# Altium PCB PCB1.PcbDoc
Units mil, origin at the board's own origin, x right, y up, seen from the top; angles counter-clockwise.
Board outline 1327.86 x 805.21 mil, 4 copper layers (Top Layer, POWER, GND, Bottom Layer), stack 23.756 mil thick; 64 components, 41 nets, 197 pads, 167 vias.
Unrouted connection lines stored in the file: 58.
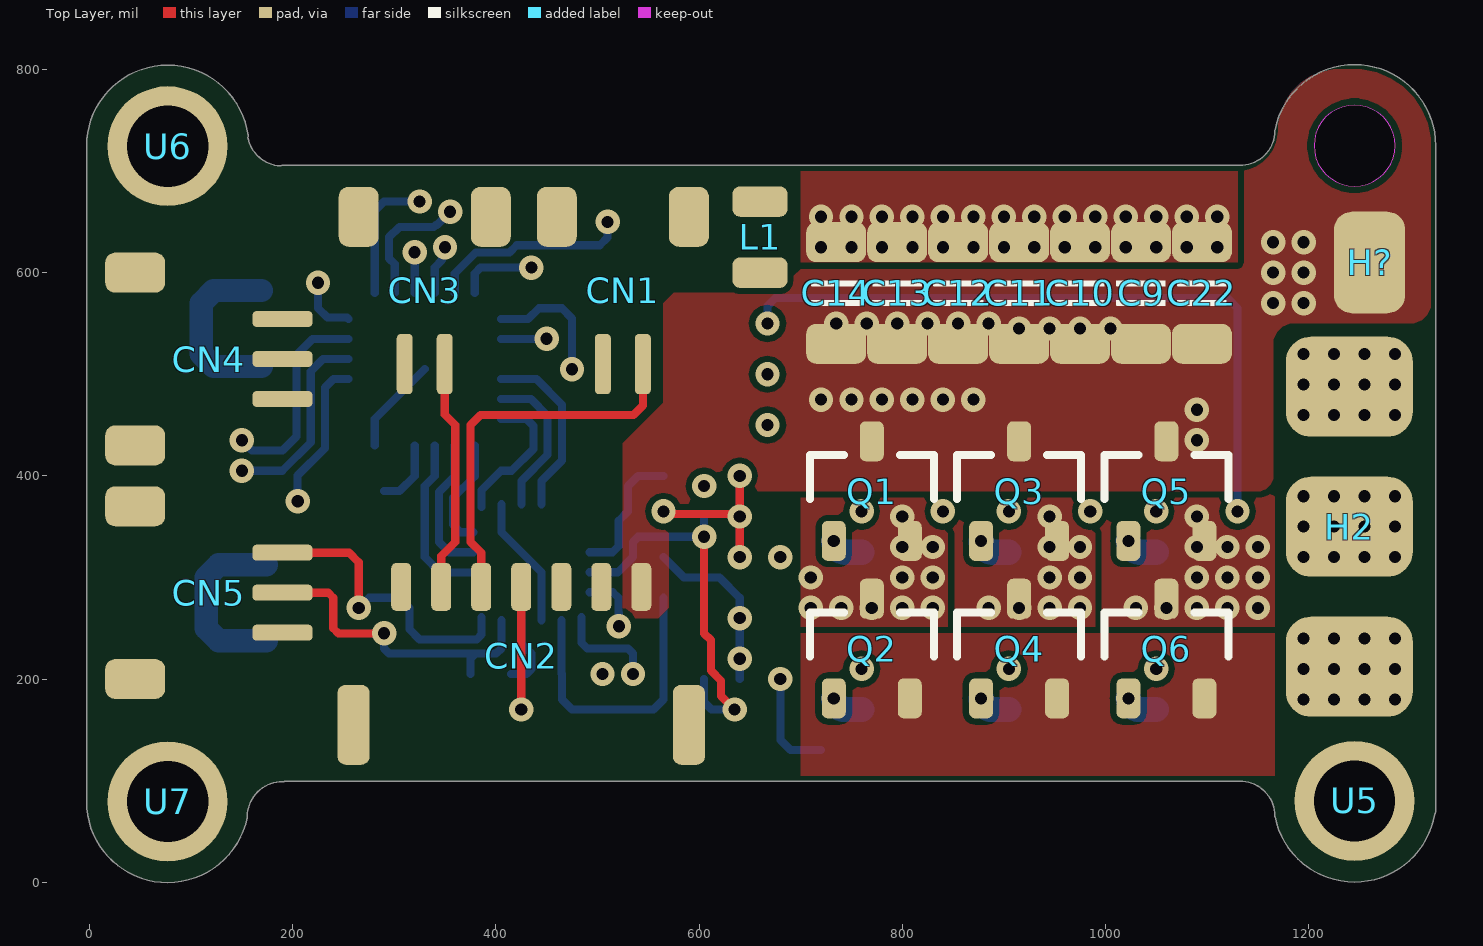
[diagram p0: Top Layer view]
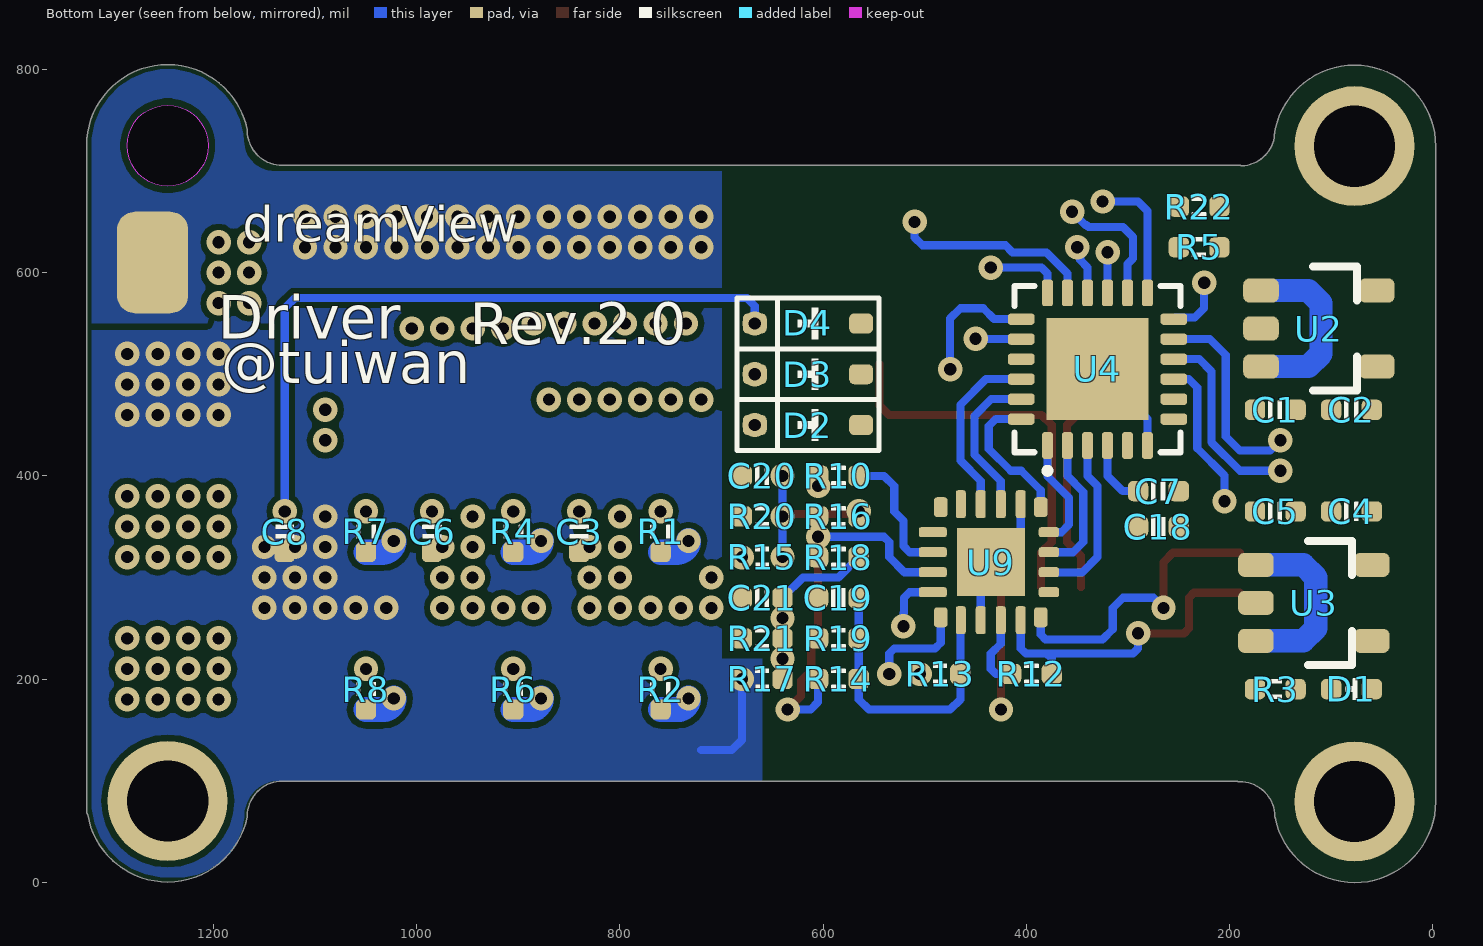
[diagram p1: Bottom Layer view, seen from below]
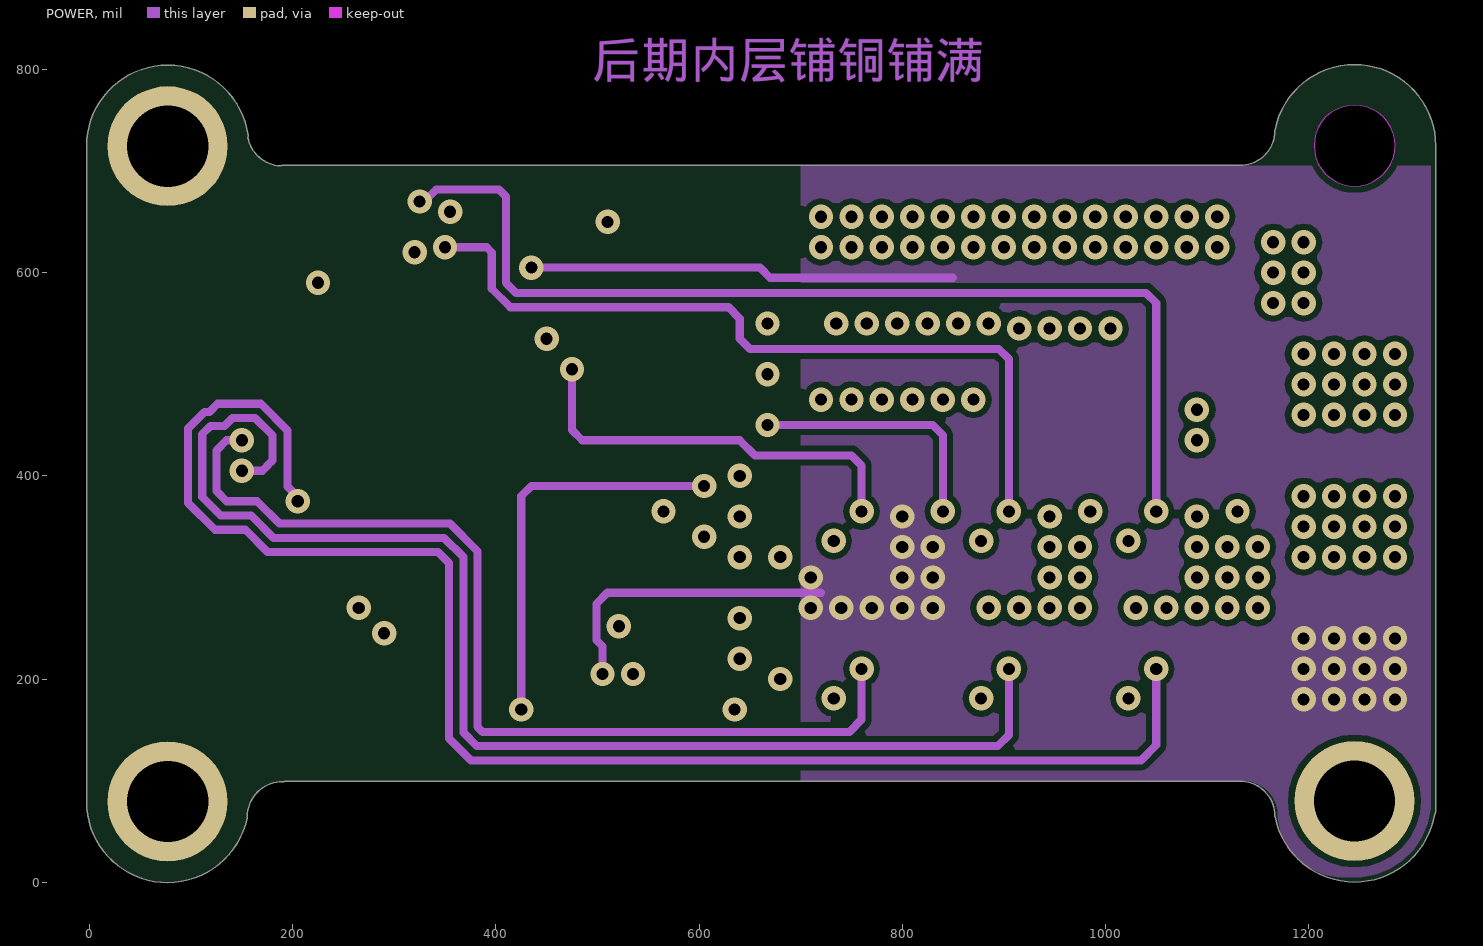
[diagram p2: POWER]
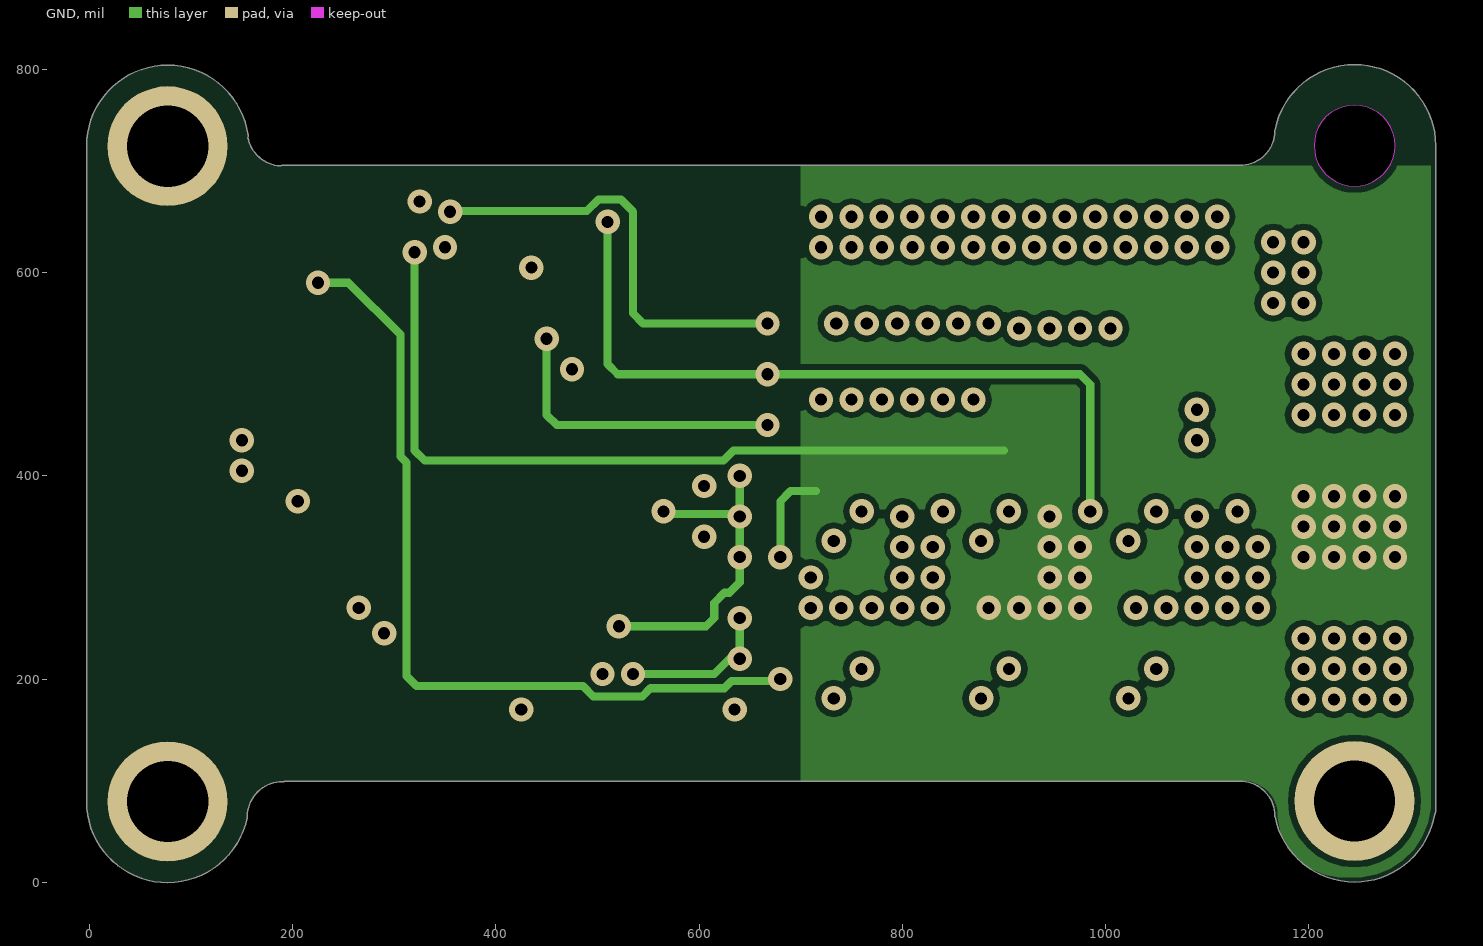
[diagram p3: GND]
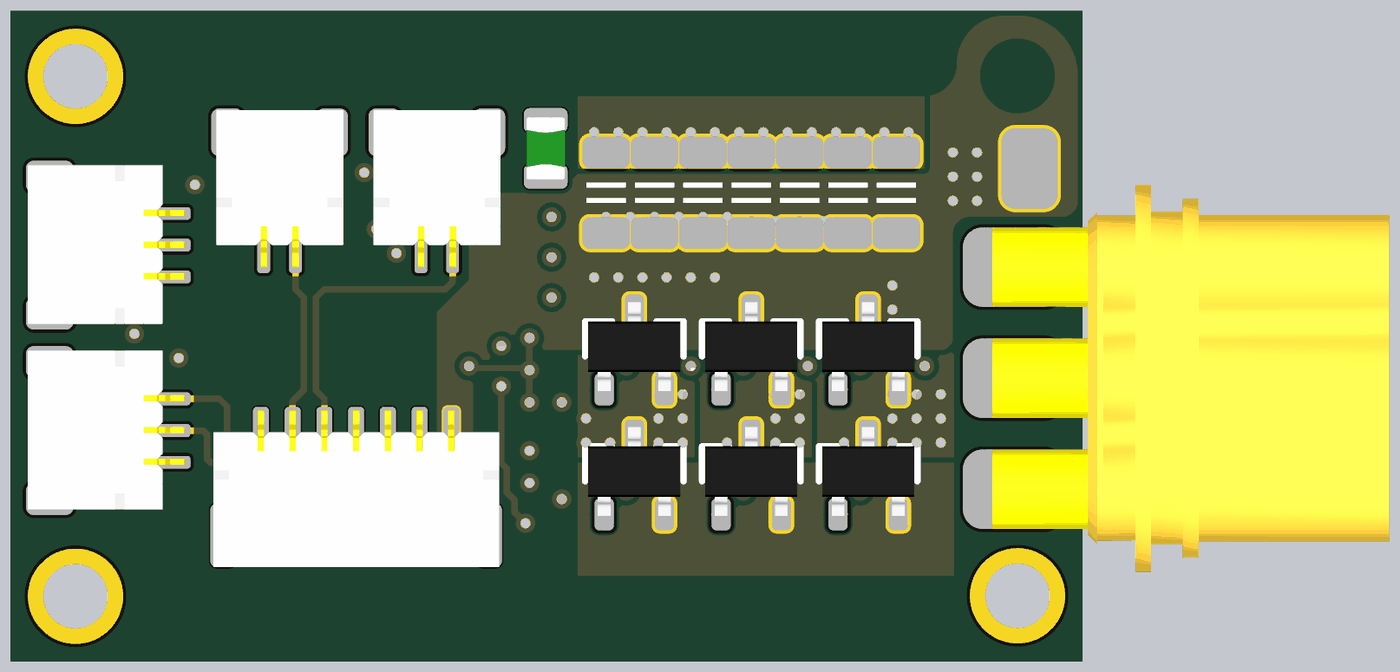
[diagram p4: 3D render of the assembled board from above, using the file's embedded part models]
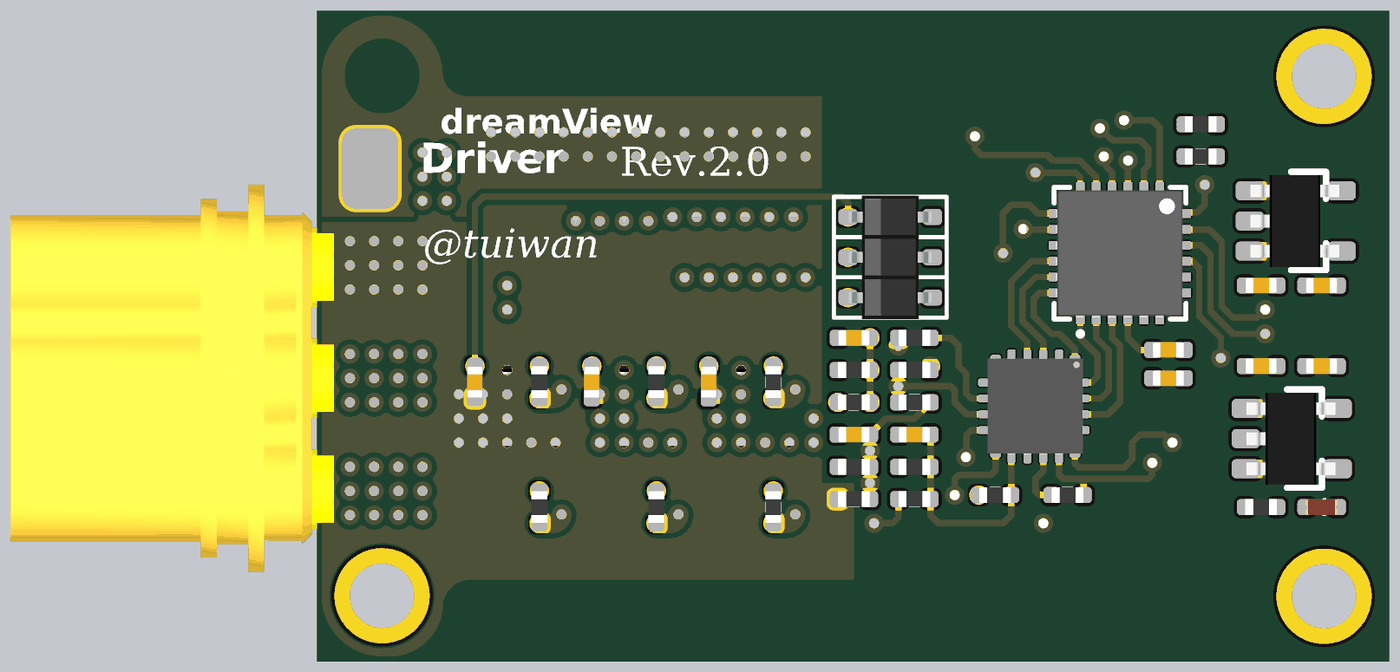
[diagram p5: 3D render of the assembled board from below, using the file's embedded part models]

## Layer stack, top to bottom
Top Solder: solder mask 0.4, Solder Resist, Dk 3.5
Top Layer: signal copper 1.4
Dielectric 2: prepreg 2.8, PP-006, Dk 4.1
POWER: signal copper 1.378
Dielectric 1: dielectric 12.6, FR-4, Dk 4.8
GND: signal copper 1.378
Dielectric 3: prepreg 2.8, PP-006, Dk 4.1
Bottom Layer: signal copper 1.4
Bottom Solder: solder mask 0.4, Solder Resist, Dk 3.5

## Board outline
76.97,-0.39 ccw(c76.97,79.43) 155.25,63.81 ccw(c150.33,64.79) 155.34,64.79 ccw(c150.33,64.79) 155.34,64.94 cw(c189.69,64.49) 189.96,98.84 ccw(c190,103.86) 192.33,99.41 1130,99.41 ccw(c1130,104.43) 1131.08,99.53 ccw(c1132.16,104.43) 1132.2,99.41 cw(c1132.47,65.06) 1166.82,65.33 ccw(c1171.84,65.37) 1166.92,64.39 ccw(c1245.2,80) 1245.2,0.18 ccw(c1245.2,80) 1323.93,66.88 ccw(c1320,70) 1325.02,70 1325.02,725 ccw(c1245.2,725) 1245.2,804.82 ccw(c1245.2,725) 1166.92,740.61 ccw(c1171.84,739.63) 1166.83,739.49 cw(c1132.47,739.94) 1132.25,705.59 ccw(c1132.17,700.57) 1132.17,705.59 672.83,705.59 190,705.59 ccw(c190,700.57) 187.78,705.07 cw(c189.69,739.37) 155.95,732.93 ccw(c151.12,734.29) 156.13,734.29 ccw(c151.12,734.29) 156.09,734.95 ccw(c76.97,724.43) 76.97,804.25 ccw(c76.97,724.43) -2.85,724.43 -2.85,79.43 ccw(c76.97,79.43)
cut-out: 1205.28,725 ccw(c1245.2,725) 1245.2,685.08 ccw(c1245.2,725) 1285.12,725 ccw(c1245.2,725) 1245.2,764.92 ccw(c1245.2,725)

## Design rules (kind name [scope] priority, off if disabled: settings)
Clearance [All] p1: gap=6 ignorepadtopadclearanceinfootprint=FALSE
ComponentClearance [All] p1 off: gap=10 collisioncheckmode=3 verticalgap=10 showdistances=FALSE
HoleSize [All] p1: absolutevalues=TRUE maxlimit=248.03 minlimit=7.87 maxpercent=80.000 minpercent=20.000
HoleToHoleClearance [All] p1: gap=6 allowstackedmicrovias=TRUE
MinimumSolderMaskSliver [All] p1: minsoldermaskwidth=6
PlaneConnect [All] p1: planeconnectstyle=Direct reliefexpansion=20 reliefentries=4 reliefconductorwidth=10 reliefairgap=10
PolygonConnect [All] p1: connectstyle=Direct reliefconductorwidth=10 reliefentries=4 polygonreliefangle="90 Angle" airgapwidth=10
RoutingVias [All] p1: holewidth=11.81 width=19.68 viastyle="Through Hole" minholewidth=11.81 minwidth=19.68 maxholewidth=236.22 maxwidth=393.7
SilkToSilkClearance [All] p1: silktosilkclearance=0
SilkToSolderMaskClearance [IsPad] p1: minsilkscreentomaskgap=0 clearancetoexposedcopper=FALSE
SolderMaskExpansion [All] p1: expansion=4
Width [All] p1: maxlimit=100 minlimit=5 preferedwidth=8 midlayer2_maxwidth=10 minimp=50.000000 maximp=50.000000 favimp=50.000000
23 further rules are at their usual default settings.

## Components (designator, comment, footprint, x,y, rotation, side; value= is the part's Value field where it differs from the comment)
C1 "?uF" CAP_0402 155,465 r180 bottom
C2 "?uF" CAP_0402 80,465 r0 bottom
C3 "?uF" CAP_0402 840,345 r90 bottom
C4 "?uF" CAP_0402 80,365 r0 bottom
C5 "?uF" CAP_0402 155,365 r180 bottom
C6 "?uF" CAP_0402 985,345 r90 bottom
C7 "10uF" CAP_0402 270,385 r0 bottom
C8 "?uF" CAP_0402 1130,345 r90 bottom
C9 "?uF" CAP_1206 1035,580 r270 top
C10 "?uF" CAP_1206 975,580 r270 top
C11 "?uF" CAP_1206 915,580 r270 top
C12 "?uF" CAP_1206 855,580 r270 top
C13 "?uF" CAP_1206 795,580 r270 top
C14 "?uF" CAP_1206 735,580 r270 top
C18 "?uF" CAP_0402 270,350 r0 bottom
C19 "?uF" CAP_0402 585,280 r0 bottom
C20 "?uF" CAP_0402 660,400 r0 bottom
C21 "?uF" CAP_0402 660,280 r0 bottom
C22 "?uF" CAP_1206 1095,580 r270 top
CN1 "HDGC1002WR-S-3P" SH1.0_2P 525,585 r180 top
CN2 "HDGC1002WR-S-7P" SH1.0_7P 425,210 r0 top
CN3 "HDGC1002WR-S-3P" SH1.0_2P 330,585 r180 top
CN4 "HDGC1002WR-S-3P" SH1.0_3P#1 110,515 r270 top
CN5 "HDGC1002WR-S-3P" SH1.0_3P#2 110,285 r270 top
D1 "color?" LED_0402 80,190 r0 bottom
D2 "Value" SOD_323 615,450 r0 bottom value=color?
D3 "Value" SOD_323 615,500 r0 bottom value=color?
D4 "Value" SOD_323 615,550 r0 bottom value=color?
H2 "MR30" MR30_F 1240,350 r90 top
H? "XT30U_M" XT60双面-小 1260,610 r0 top
L1 "Value" IND_0805 660,635 r270 top
Q1 "Value" SOT23_3 770,385 r90 top
Q2 "Value" SOT23_3 770,230 r90 top
Q3 "Value" SOT23_3 915,385 r90 top
Q4 "Value" SOT23_3 915,230 r90 top
Q5 "Value" SOT23_3 1060,385 r90 top
Q6 "Value" SOT23_3 1060,230 r90 top
R1 "?K" RES_0402 760,345 r270 bottom value=22R
R2 "?K" RES_0402 760,190 r90 bottom value=22R
R3 "?K" RES_0402 155,190 r180 bottom value=22R
R4 "?K" RES_0402 905,345 r90 bottom value=22R
R5 "10K" RES_0402 230,625 r0 bottom value=22R
R6 "?K" RES_0402 905,190 r270 bottom value=22R
R7 "?K" RES_0402 1050,345 r270 bottom value=22R
R8 "?K" RES_0402 1050,190 r270 bottom value=22R
R10 "1K" RES_0402 585,400 r0 bottom value=22R
R12 "10K" RES_0402 395,205 r0 bottom value=22R
R13 "47K" RES_0402 485,205 r180 bottom value=22R
R14 "10K" RES_0402 585,200 r0 bottom value=22R
R15 "47K" RES_0402 660,320 r180 bottom value=22R
R16 "10K" RES_0402 585,360 r0 bottom value=22R
R17 "47K" RES_0402 660,200 r180 bottom value=22R
R18 "10K" RES_0402 585,320 r0 bottom value=22R
R19 "4.7K" RES_0402 585,240 r180 bottom value=22R
R20 "4.7K" RES_0402 660,360 r180 bottom value=22R
R21 "4.7K" RES_0402 660,240 r180 bottom value=22R
R22 "10K" RES_0402 230,665 r0 bottom value=22R
U2 "SPX3819M5-5" SOT23_5 110,545 r180 bottom
U3 "SPX3819M5-5" SOT23_5 115,275 r180 bottom
U4 "FD6288Q" QFN-24_L4.0-W4.0-P0.50-BL-EP2.6 330,505 r180 bottom
U5 "螺柱孔" M2 1245.2,80 r0 top
U6 "螺柱孔" M2 76.97,724.43 r0 top
U7 "螺柱孔" M2 76.97,79.43 r0 top
U9 "EFM8BB21F16G-C-QFN20R" QFN-20_L3.0-W3.0-P0.50-BL-EP1.7_EFM8BB21F16G 435,315 r180 bottom

## Footprints (in the part's own frame and the unit in brackets; to place one, negate y for a bottom-side part, rotate by r counter-clockwise, add the part's x,y. Pads: shape width x height; smd on the part's side, far side on the other; paste and mask are expansions set on the pad)
CAP_0402 [mil] "CAP_0402"
  rrect50% 20x20 smd: 1(-20,0) 2(20,0)
  silkscreen extent -7,-9 7,9, body extent -20,-10 20,10, height 20
CAP_1206 [mm] "CAP_1206"
  rrect50% 1x1.5 smd: 1(-1.27,0) 2(1.27,0)
  silkscreen extent -0.3,-0.61 0.3,0.61, body extent -1.5,-0.75 1.5,0.75, height 1.5
IND_0805 [mil]
  rrect50% 30x54.21 smd mask+2: 1(-35,0) 2(35,0)
  body extent -39,-25 39,25, height 24
LED_0402 [mil] "LED_0402"
  rrect50% 20x20 smd: 1(-20,0) 2(20,0)
  silkscreen extent -6,-10 6,10, body extent -20,-10 20,10, height 18
M2 [mm] "M2螺孔"
  round 3 hole 2.032 mask+0.102: 1(0,0)
MR30_F [mm] "MR30_F_卧贴"
  rrect50% 2.5x3.175 smd: 1(-3.5,0) 2(0,0) 3(3.5,0)
  body extent -6.1,-11.84 6.1,0.66, height 2.6
QFN-20_L3.0-W3.0-P0.50-BL-EP1.7_EFM8BB21F16G [mm]
  rrect50% 0.34x0.5 smd mask+0.05: 1(-1.252,-1.377) 6(1.249,-1.377) 11(1.249,1.377) 16(-1.252,1.377)
  rrect50% 0.25x0.7 smd mask+0.05: 2(-0.751,-1.45) 3(-0.252,-1.45) 4(0.249,-1.45) 5(0.748,-1.45) 12(0.748,1.45) 13(0.249,1.45) 14(-0.252,1.45) 15(-0.751,1.45)
  rrect50% 0.508x0.25 smd mask+0.05: 7(1.451,-0.75) 8(1.451,-0.25) 9(1.451,0.25) 10(1.451,0.75)
  rrect50% 0.7x0.25 smd mask+0.05: 17(-1.451,0.75) 18(-1.451,0.25) 19(-1.451,-0.25) 20(-1.451,-0.75)
  rect 1.7x1.7 smd mask+0.05: 21(-0.001,0)
  body extent -1.51,-1.5 1.51,1.52, height 0.82
QFN-24_L4.0-W4.0-P0.50-BL-EP2.6 [mm]
  rrect50% 0.28x0.665 smd mask+0.05: 1(-1.25,-1.908) 2(-0.75,-1.908) 3(-0.25,-1.908) 4(0.25,-1.908) 5(0.75,-1.908) 6(1.25,-1.908) 13(1.25,1.908) 14(0.75,1.908) 15(0.25,1.908) 16(-0.25,1.908) 17(-0.75,1.908) 18(-1.25,1.908)
  rrect50% 0.665x0.28 smd mask+0.05: 7(1.908,-1.25) 8(1.908,-0.75) 9(1.908,-0.25) 10(1.908,0.25) 11(1.908,0.75) 12(1.908,1.25) 19(-1.908,1.25) 20(-1.908,0.75) 21(-1.908,0.25) 22(-1.908,-0.25) 23(-1.908,-0.75) 24(-1.908,-1.25)
  rect 2.55x2.55 smd mask+0.05: 25(0,0)
  silkscreen extent -2.08,-2.61 2.08,2.08, body extent -2.01,-2.01 1.99,1.99, height 0.92
RES_0402 [mil] "RES_0402"
  rrect50% 20x20 smd: 1(-20,0) 2(20,0)
  silkscreen extent -6,-10 7,10, body extent -20,-10 20,10, height 14
SH1.0_2P [mm] "SH1.0_2P"
  rrect50% 0.4x1.5 smd: 1(-0.5,1.905) 2(0.5,1.905)
  rrect50% 1x1.5 smd: SH1(-1.651,-1.778) SH2(1.651,-1.778)
  body extent -2.01,-2.47 1.99,2.48, height 2.9
SH1.0_3P#1 [mm] "SH1.0_3P"
  rrect50% 0.4x1.5 smd: 1(-1,2.032) 2(0,2.032) 3(1,2.032)
  rrect50% 1x1.5 smd: SH1(-2.159,-1.651) SH2(2.159,-1.651)
  body extent -2.52,-2.34 2.48,2.6, height 2.9
SH1.0_3P#2 [mm] "SH1.0_3P"
  rrect50% 0.4x1.5 smd: 1(-1,2.032) 2(0,2.032) 3(1,2.032)
  rrect50% 1x1.5 smd: 4(2.159,-1.651) 5(-2.159,-1.651)
  body extent -2.52,-2.34 2.48,2.6, height 2.9
SH1.0_7P [mm] "SH1.0_7P"
  rrect50% 0.5x1.2 smd mask+0.05: 1(-3,2.05) 2(-2,2.05) 3(-1,2.05) 4(0,2.05) 5(1,2.05) 6(2,2.05) 7(3,2.05)
  rrect50% 0.8x2 smd mask+0.05: 8(4.191,-1.397) 9(-4.191,-1.397)
  body extent -4.5,-2.4 4.5,2.55, height 2.9
SOD_323 [mm] "SOD_323"
  rrect50% 0.6x0.5 smd: 1(-1.329,0) 2(1.329,0)
  silkscreen extent -1.78,-0.64 1.78,0.64, body extent -1.3,-0.68 1.3,0.67, height 1.15
SOT23_3 [mm] "SOT23, 3-Leads, Body 3.1x3.0mm (max), Pitch 0.95mm, IPC Medium Density"
  rrect50% 1x0.6 smd: 1(-1.246,0.95) 2(-1.246,-0.95) 3(1.246,0)
  silkscreen extent -0.2,-1.55 0.9,1.55, body extent -1.3,-1.45 1.5,1.45, height 1.2
SOT23_5 [mm] "SOT23_5"
  rrect50% 0.889x0.6 smd: 1(-1.5,0.95) 2(-1.5,0) 3(-1.5,-0.95) 4(1.396,-0.95) 5(1.396,0.95)
  silkscreen extent -0.2,-1.55 0.9,1.55, body extent -1.48,-1.45 1.32,1.45, height 1.2
XT60双面-小 [mil] "XT60双面"
  rrect50% 70x100 smd far side mask+4: 1(0,0)
  rrect50% 70x100 smd mask+4: 2(0,0)

## Part data
C1 C2 C3 C4 C5 C6 C7 C8 C9 C10 C11 C12 C13 C14 C18 C19 C20 C21 C22: library part Capacitor_MLCC, "Capacitor_MLCC"
CN1 CN3: library part SH1.0-2P, "SH1.0针座卧贴 2P", JLCPCB Part Class=扩展库, LCSC Part Name="SH1.0针座卧贴 3P", Manufacturer=HDGC(华德共创), Add into BOM=yes, Convert to PCB=yes, Datasheet=https://atta.szlcsc.com/upload/public/pdf/source/20211229/E8A09E85670B5E97244D2008A24D97FE.pdf, Device=HDGC1002WR-S-3P, Manufacturer Part=HDGC1002WR-S-3P, Name=HDGC1002WR-S-3P, Supplier=LCSC, Supplier Footprint=SMD,P=1mm, Supplier Part=C2936213, Symbol=HDGC1002WR-S-3P
CN2: library part SH1.0-7P, "SH1.0针座卧贴 7P", JLCPCB Part Class=扩展库, Manufacturer=HDGC(华德共创), Add into BOM=yes, Convert to PCB=yes, Datasheet=https://atta.szlcsc.com/upload/public/pdf/source/20220916/BAB1FBE762C51A6AFF93A047416729EC.pdf, Device=HDGC1002WR-S-7P, LCSC Part Name="SH1.0针座卧贴 7P", Manufacturer Part=HDGC1002WR-S-7P, Name=HDGC1002WR-S-7P, Supplier=LCSC, Supplier Footprint=SMD,P=1mm, Supplier Part=C5175296, Symbol=HDGC1002WR-S-7P
CN4: library part SH1.0-3P, "SH1.0针座卧贴 3P", JLCPCB Part Class=扩展库, Manufacturer=HDGC(华德共创), Add into BOM=yes, Convert to PCB=yes, Datasheet=https://atta.szlcsc.com/upload/public/pdf/source/20211229/E8A09E85670B5E97244D2008A24D97FE.pdf, Device=HDGC1002WR-S-3P, LCSC Part Name="SH1.0针座卧贴 3P", Manufacturer Part=HDGC1002WR-S-3P, Name=HDGC1002WR-S-3P, Supplier=LCSC, Supplier Footprint=SMD,P=1mm, Supplier Part=C2936213, Symbol=HDGC1002WR-S-3P
CN5: library part 3P端子, JLCPCB Part Class=扩展库, LCSC Part Name="SH1.0针座卧贴 3P", Manufacturer=HDGC(华德共创), Add into BOM=yes, Convert to PCB=yes, Datasheet=https://atta.szlcsc.com/upload/public/pdf/source/20211229/E8A09E85670B5E97244D2008A24D97FE.pdf, Device=HDGC1002WR-S-3P, Manufacturer Part=HDGC1002WR-S-3P, Name=HDGC1002WR-S-3P, Supplier=LCSC, Supplier Footprint=SMD,P=1mm, Supplier Part=C2936213, Symbol=HDGC1002WR-S-3P
D1: library part LED, "LED"
D2 D3 D4: library part Diode_SMD, "Diode_SMD"
H2 H?: JLCPCB Part Class=扩展库, Manufacturer=AMASS(艾迈斯), Manufacturer Part=XT30U-M, Add into BOM=yes, Convert to PCB=yes, Device=XT30U-M, Name=XT30U-M, Pin Type=IN, Supplier=LCSC, Supplier Part=C99101, Symbol=DC电源
L1: library part Inductor_SMD, "Inductor_SMD"
Q1 Q2 Q3 Q4 Q5 Q6: library part MOSFET_N, "N_MOS"
R1 R2 R3 R4 R5 R6 R7 R8 R10 R12 R13 R14 R15 R16 R17 R18 R19 R20 R21 R22: library part Resistor_SMD, "Resistor_SMD"
U2 U3: library part LP2992, "LP2992_LDO"
U4: JLCPCB Part Class=扩展库, Manufacturer="Fortior Tech(峰岹)", Add into BOM=yes, Convert to PCB=yes, Datasheet=https://atta.szlcsc.com/upload/public/pdf/source/20181108/C328453_785547738DB9FC0123219FC22539EFAD.pdf, Device=FD6288Q, LCSC Part Name=FD6288Q, Manufacturer Part=FD6288Q, Name=FD6288Q, Supplier=LCSC, Supplier Footprint=QFN-24-EP(4x4), Supplier Part=C328453, Symbol=FD6288Q_C328453
U5 U6 U7: library part Hole, _=3, Add into BOM=yes, Convert to PCB=yes, Device=M2螺柱孔, Symbol=M2螺柱孔
U9: "CPU内核:51系列;CPU最大主频:50MHz;工作电压范围:2.2V~3.6V;内部振荡器:有;程序 FLASH容量:16K@x8bit;RAM总容量:2.25KB;EEPROM/数据 FLASH容量:-;GPIO端口数量:16;ADC(单元数/通道数/位数):1@x15ch/12bit;外设/功能/协议栈:欠压检测/复位；看门狗；POR"

## Via types
v1: diameter 24, hole 12, Top Layer to Bottom Layer, tented both sides, 167 vias

## Nets (pads, with @x,y where several pads share a name; then routed paths per layer and width w, separated by ;. In a path a pad name is that pad's centre, name@x,y a point inside that pad or via, vN(x,y) a via of type N, cw(c..) or ccw(c..) an arc to the next point about the centre after c; other vN are vias at no path point)
3V3: C4.2 C5.2 C18.2 CN2.6 D1.1 R5.1 R12.2 R22.1 U3.5 U9.4 | length 74
  Bottom Layer w8: R12.2 430,205 435,210 435,225 425.22,234.79 U9.4
+5: C1.2 C2.2 C7.2 CN4.2 D2.1 D3.1 D4.1 U2.5 U4.4 | length 66.3
  Bottom Layer w8: C7.2 305.2,385 320.16,399.96 U4.4
A: C3.1 H2.1 Q1.2 Q2.3 R13.1 U4.18 | length 793.4
  POWER w8: v1(435,605) 660,605 670,595 850,595 ; v1(505,205) 505,232.26 499.08,238.18 499.08,274.08 510,285 720,285
  Bottom Layer w8: U4.18 379.21,599.21 385,605 v1(435,605)
  other v1: 1195,180 1225,180 1255,180 1285,180 1195,210 1225,210 1255,210 1285,210 1195,240 1225,240 1255,240 1285,240 710,270 740,270 770,270 800,270 830,270 710,300 800,300 830,300 800,330 830,330 800,360
AL: U4.1 U9.10 | length 109.6
  Bottom Layer w8: U9.10 365.48,344.53 358,352 358,378.4 379.21,399.61 U4.1
AP: U4.22 U9.14 | length 176.6
  Bottom Layer w8: U4.22 439.84,495.16 465,470 465,415 444.9,394.9 U9.14
B: C6.1 H2.2 Q3.2 Q4.3 R15.1 U4.15 | length 917.3
  GND w8: v1(320,620) 320,425 330,415 623.89,415 633.89,425 900,425 ; v1(680,320) 680,375 690,385 715,385
  Bottom Layer w8: U4.15 v1@320.16,620
  other v1: 885,270 915,270 945,270 975,270 945,300 975,300 1195,320 1225,320 1255,320 1285,320 945,330 975,330 1195,350 1225,350 1255,350 1285,350 945,360 1195,380 1225,380 1255,380 1285,380
BL: U4.2 U9.9 | length 139.4
  Bottom Layer w8: U4.2 359.53,399.73 344,384.2 344,335 354.15,324.85 U9.9
BP: U4.23 U9.13 | length 150.3
  Bottom Layer w8: U4.23 434.53,475.47 451,459 451,420.8 425.22,395.01 U9.13
C: C8.1 H2.3 Q5.2 Q6.3 R17.1 U4.12 | length 987.4
  GND w8: v1(225,590) 255,590 306,539 306,419.2 312,413.2 312,203 322,193 485.89,193 495.89,183 544.11,183 552.11,191 624.89,191 631.89,198 678,198 v1(680,200)
  Bottom Layer w8: v1(225,590) 225,565 234.28,555.72 253.39,555.72 U4.12 ; v1(680,200) 680,140 690,130 720,130
  other v1: 1030,270 1060,270 1090,270 1120,270 1150,270 1090,300 1120,300 1150,300 1090,330 1120,330 1150,330 1090,360 1195,460 1225,460 1255,460 1285,460 1195,490 1225,490 1255,490 1285,490 1195,520 1225,520 1255,520 1285,520
C2CK: CN5.2 R12.1 U9.5 | length 318.7
  Top Layer w8: CN5.2 235,285 240,280 240,250 245,245 v1(290,245)
  Bottom Layer w8: v1(290,245) 290,230 295,225 380,225 ; R12.1 375,220 380,225 ; U9.5 405.53,230.22 400.31,225 380,225
C2D: CN5.1 U9.6 | length 297.2
  Top Layer w8: CN5.1 255.63,324.37 265,315 v1(265,270)
  Bottom Layer w8: v1(265,270) 275,280 305,280 315,270 315,249 325,239 381.16,239 385.85,243.69 U9.6
CC: R14.2 R16.2 R18.2 U9.19 | length 414.5
  Top Layer w8: v1(605,340) 605,245 611.69,238.31 611.69,208.31 621.69,198.31 621.69,183.31 v1(635,170)
  Bottom Layer w8: U9.19 520,305.15 520,305 535,320 535,335 540,340 v1(605,340) ; R14.2 605,177.27 612.27,170 v1(635,170) ; R18.2 v1(605,340) ; R16.2 v1(605,340)
CL: U4.3 U9.8 | length 168.1
  Bottom Layer w8: U4.3 339.84,399.84 330,390 330,320 345,305 377.7,305 U9.8
CP: U4.24 U9.11 | length 141.8
  Bottom Layer w8: U9.11 385.85,385.85 405,405 415.4,405 437,426.6 437,448.98 430.19,455.79 U4.24
GND: C1.1 C2.1 C4.1 C5.1 C7.1 C18.1 C19.2 C20.2 C21.2 CN1.2 CN1.SH1 CN1.SH2 CN2.1 CN2.8 CN2.9 CN3.2 CN3.SH1 CN3.SH2 CN4.1 CN4.SH1 CN4.SH2 CN5.3 CN5.4 CN5.5 L1.2 R3.2 R19.1 R20.1 R21.1 U2.2 U3.2 U4.6 U4.25 U5.1 U6.1 U7.1 U9.3 U9.12 U9.21 | length 226
  Bottom Layer w8: U4.6 280.79,455.79 U4.25 ; U9.12 405.53,344.52 U9.21 444.9,305.14 U9.3
H01: R1.1 U4.19 | length 533
  POWER w8: v1(475,505) 475,445 485,435 640,435 655,420 750,420 760,410 v1(760,365)
  Bottom Layer w8: U4.19 431.7,554.21 442.49,565 465,565 475,555 v1(475,505)
H02: R4.2 U4.16 | length 832.4
  POWER w8: v1(350,625) 391,625 396,620 396,584.2 414.2,566 629,566 640,555 640,535 650,525 895,525 905,515 v1(905,365)
  Bottom Layer w8: U4.16 339.84,605.19 346.94,612.29 346.94,621.94 v1(350,625)
H03: R7.1 U4.13 | length 1159.9
  POWER w8: v1(325,670) 329.33,670 341.33,682 403,682 410,675 410,590 420,580 1040,580 1050,570 v1(1050,365)
  Bottom Layer w8: U4.13 280.79,660.79 290,670 v1(325,670)
L01: R2.2 U4.11 | length 1159.8
  POWER w8: v1(150,435) 135,435 125,425 125,385 135,375 165,375 187,353 354.8,353 382,325.8 382,153 387,148 748,148 760,160 v1(760,210)
  Bottom Layer w8: v1(150,435) 160,425 190,425 203.81,438.81 203.81,455.83 203.81,518.81 219.53,534.53 U4.11
L02: R6.1 U4.10 | length 1451.4
  POWER w8: v1(150,405) 170.31,405 175,409.69 175,410 180,415 180,440 163,457 140.89,457 132.89,449 119,449 111,441 111,379.2 129.2,361 159.2,361 181.2,339 349,339 368,320 368,147.2 381.2,134 894,134 905,145 v1(905,210)
  Bottom Layer w8: v1@160,405 189.8,405 217.81,433.01 217.81,461.63 217.81,502.81 229.84,514.84 U4.10
L03: R8.1 U4.9 | length 1656.2
  POWER w8: v1(205,375) 205,379.33 195,389.33 195,444.8 168.8,471 126,471 118,463 113.2,463 97,446.8 97,373.4 123.4,347 153.4,347 175.4,325 343.2,325 354,314.2 354,141.4 375.4,120 1035,120 1050,135 v1(1050,210)
  Bottom Layer w8: v1(205,375) 204.9,375.1 204.9,400.3 231.81,427.21 231.81,467.43 231.81,486.81 240.16,495.16 U4.9
MA: C19.1 R13.2 R14.1 R19.2 U9.2 | length 286.4
  Bottom Layer w8: U9.2 464.79,257.71 464.79,205.21 R13.2 465,180 475,170 555,170 565,180 R14.1 C19.1
MB: C20.1 R15.2 R16.1 R20.2 U9.20 | length 623.5
  Top Layer w8: v1(565,365) 567.5,362.5 637.5,362.5 v1(640,360) ; v1(640,320) v1(640,360) ; v1(640,400) v1(640,360)
  GND w8: v1(521.08,252) 607,252 615,260 615,275 625,285 630,285 640,295 v1(640,320) v1(640,360) ; v1(565,365) 567.5,362.5 637.5,362.5 v1(640,360) ; v1(640,400) v1(640,360)
  Bottom Layer w8: U9.20 515.06,285.46 520.56,279.97 520.56,265.56 521.08,265.04 v1(521.08,252) ; v1(640,320) v1(640,360) v1(640,400)
MC: C21.1 R17.2 R18.1 R21.2 U9.1 | length 423
  GND w8: v1(535,205) 615,205 630,220 v1(640,220) v1(640,260)
  Bottom Layer w8: U9.1 484.27,235.72 490,230 530,230 535,225 v1(535,205) ; R18.1 585,300 620,300 C21.1 v1(640,260) v1(640,220) R17.2
MICROSWITCH1: CN1.1 CN2.3 R5.2 | length 382
  Top Layer w8: CN2.3 385.62,324.38 375,335 375,450 385,460 535.31,460 544.69,469.37 CN1.1
MICROSWITCH2: CN2.2 CN3.1 R22.2 | length 229.3
  Top Layer w8: CN2.2 346.26,321.26 360,335 360,450 349.69,460.31 CN3.1
NetC3_2: C3.2 D2.2 U4.20 | length 593.4
  POWER w8: v1(667.34,450) 830,450 840,440 v1(840,365)
  GND w8: v1(450,535) 450,460 460,450 v1(667.34,450)
  Bottom Layer w8: U4.20 449.53,534.53 v1(450,535)
NetC6_2: C6.2 D3.2 U4.17 | length 947.9
  GND w8: v1(510,650) 510,510 520,500 v1(667.34,500) 975,500 985,490 v1(985,365)
  Bottom Layer w8: U4.17 359.53,599.33 380.2,620 413.56,620 420.56,627 502.31,627 510,634.69 v1(510,650)
NetC8_2: C8.2 D4.2 U4.14 | length 1241.3
  GND w8: v1(355,660) 355.56,660.56 489.44,660.56 500.89,672 523,672 535,660 535,560 545,550 v1(667.34,550)
  Bottom Layer w8: U4.14 300.47,608.42 295,613.89 295,635 305,645 338.89,645 340.89,647 342,647 v1(355,660) ; v1(667.34,550) 667.34,567.34 675,575 1120,575 1130,565 v1(1130,365)
NetD1_2: D1.2 R3.1
NetQ1_1: Q1.1 R1.2 | length 33.6
  Bottom Layer w25: v1(732.6,335.94) ccw(c743.54,335.94) 743.54,325 R1.2
NetQ2_1: Q2.1 R2.1 | length 33.6
  Bottom Layer w25: v1(732.6,180.94) ccw(c743.54,180.94) 743.54,170 R2.1
NetQ3_1: Q3.1 R4.1 | length 33.6
  Bottom Layer w25: v1(877.6,335.94) ccw(c888.54,335.94) 888.54,325 R4.1
NetQ4_1: Q4.1 R6.2 | length 33.6
  Bottom Layer w25: v1(877.6,180.94) ccw(c888.54,180.94) 888.54,170 R6.2
NetQ5_1: Q5.1 R7.2 | length 33.6
  Bottom Layer w25: v1(1022.6,335.94) ccw(c1033.54,335.94) 1033.54,325 R7.2
NetQ6_1: Q6.1 R8.2 | length 33.6
  Bottom Layer w25: v1(1022.6,180.94) ccw(c1033.54,180.94) 1033.54,170 R8.2
NetR10_1: R10.1 U9.18 | length 133.3
  Bottom Layer w8: U9.18 514.85,324.85 521,331 521,355.8 530,364.8 530,390 540,400 R10.1
PGND: C9.1 C10.1 C11.1 C12.1 C13.1 C14.1 C22.1 H?.1 L1.1 Q2.2 Q4.2 Q6.2
  other v1: 720,625 750,625 780,625 810,625 840,625 870,625 900,625 930,625 960,625 990,625 1020,625 1050,625 1080,625 1110,625 720,655 750,655 780,655 810,655 840,655 870,655 900,655 930,655 960,655 990,655 1020,655 1050,655 1080,655 1110,655
RC: CN2.4 R10.2 | length 514.8
  Top Layer w8: v1(425,170) CN2.4
  POWER w8: v1(425,170) 425,380 435,390 v1(605,390)
TIM1_CH4: CN2.5 CN4.3
VM: C9.2 C10.2 C11.2 C12.2 C13.2 C14.2 C22.2 CN2.7 H?.2 Q1.3 Q3.3 Q5.3 U2.1 U2.3 U3.1 U3.3 | length 356.8
  Bottom Layer w23: U2.3 122.4,507.6 110,520 110,570 122.4,582.4 U2.1 ; U3.3 127.4,237.6 115,250 115,300 127.4,312.4 U3.1
  other v1: 1090,435 1090,465 720,475 750,475 780,475 810,475 840,475 870,475 915,545 945,545 975,545 1005,545 735,550 765,550 795,550 825,550 855,550 885,550 1165,570 1195,570 1165,600 1195,600 1165,630 1195,630
pads on no net: U2.4 U3.4 U4.5 U4.7 U4.8 U4.21 U9.7 U9.15 U9.16 U9.17

## Polygon pours and split planes (outlines as drawn)
VM on Top Layer "Top Layer-VM" (solid, remove dead copper, pour order 12): 1185,550 ccw(c1185,530) 1165,530 1165,400 cw(c1150,400) 1150,385 1130,385 1130,502.98 ccw(c1117.81,503.1) 1117.93,515.29 cw(c1115,530.01) 1115,515 700,515 700,640 1130,640 1130,700 ccw(c1130,740) 1170,740 cw(c1230,740) 1230,800 1245,800 cw(c1245,725) 1320,725 1320,570 cw(c1300,570) 1300,550
PGND on Top Layer "Top Layer-PGND" (solid, remove dead copper, pour order 8): 700,700 700,610 1130,610 1130,700
PGND on Top Layer "Top Layer-PGND 1" (solid, remove dead copper, pour order 0): 700,245 700,105 1166.83,105 1166.83,245
C on Top Layer "Top Layer-C" (solid, remove dead copper, pour order 14): 990,385 990,250 1166.83,250 1166.83,385
B on Top Layer "Top Layer-B" (solid, remove dead copper, pour order 6): 845,385 845,250 990,250 990,385
A on Top Layer "Top Layer-A" (solid, remove dead copper, pour order 4): 700,385 700,250 845,250 845,385
VM on Top Layer "Top Layer-VM 1" (solid, remove dead copper, pour order 2): 676.49,580 701.49,605 760,605 785,580 1130,580 1130,385 605,385 570,350 570,270 560,260 535,260 525,270 525,432.09 565,472.09 565,570 575,580
C on Bottom Layer "Bottom Layer-C" (solid, remove dead copper, pour order 24): 700,220 660,220 660,100 1135,100 cw(c1135,65) 1169.58,70.42 ccw(c1235,70.42) 1235,5 1244.88,5 ccw(c1245,80) 1320,80 1320,605 700,605
PGND on Bottom Layer "Bottom Layer-PGND" (solid, remove dead copper, pour order 10): 1184.94,550 1320,550 1320,725 ccw(c1245,725) 1245,800 ccw(c1245,725) 1170.15,729.77 cw(c1140.38,729.77) 1140.38,700 700,700 700,550
A on POWER "POWER-A" (solid, remove dead copper, pour order 18): 1320,705.07 700,705.07 700,100 1135,100 cw(c1135,65) 1169.58,70.42 ccw(c1235,70.42) 1235,5 1244.88,5 ccw(c1245,80) 1320,80
B on GND "GND-B" (solid, remove dead copper, pour order 22): 1320,705.07 700,705.07 700,100 1135,100 cw(c1135,65) 1169.58,70.42 ccw(c1235,70.42) 1235,5 1244.88,5 ccw(c1245,80) 1320,80

## Other copper
Top Layer:
  region: 1140,590
POWER:
  text "后期内层铺铜铺满" at 495,780 h60

## Silkscreen, mask and mechanical layers (free items; w line width, h text height)
Bottom Overlay:
  text "dreamView" at 1171.25,618.59 h60
  text "Driver" at 1196.09,520.71 h73
  text "Rev.2.0" at 948.02,515.71 h70
  text "@tuiwan" at 1192.5,477.17 h70
Mechanical 1:
  lines w10: 150.32,64.79 cw(c189.69,64.49) 190,103.86 ; 150.32,739.06 ccw(c189.69,739.37) 190,700 ; 150.33,64.79 cw(c76.97,79.43) 76.97,4.62 cw(c76.97,79.43) 2.17,79.43 2.17,724.43 cw(c76.97,724.43) 76.97,799.23 cw(c76.97,724.43) 151.12,734.29 ; 190,104.43 460,104.43 1130,104.43 ; 190,700.57 672.83,700.57 1132.17,700.57 ccw(c1132.47,739.94) 1171.84,739.63 cw(c1245.2,725) 1245.2,799.8 cw(c1245.2,725) 1320,725 1320,70 ; 1132.16,104.43 cw(c1132.47,65.06) 1171.84,65.37 ccw(c1245.2,80) 1245.2,5.2 ccw(c1245.2,80) 1320,80